# Altium PCB PCB.PcbDoc
Units mm, origin at the board's own origin, x right, y up, seen from the top; angles counter-clockwise.
Board outline 37.47 x 36.7 mm, 2 copper layers (Top Layer, Bottom Layer); 28 components, 24 nets, 64 pads, 0 vias.
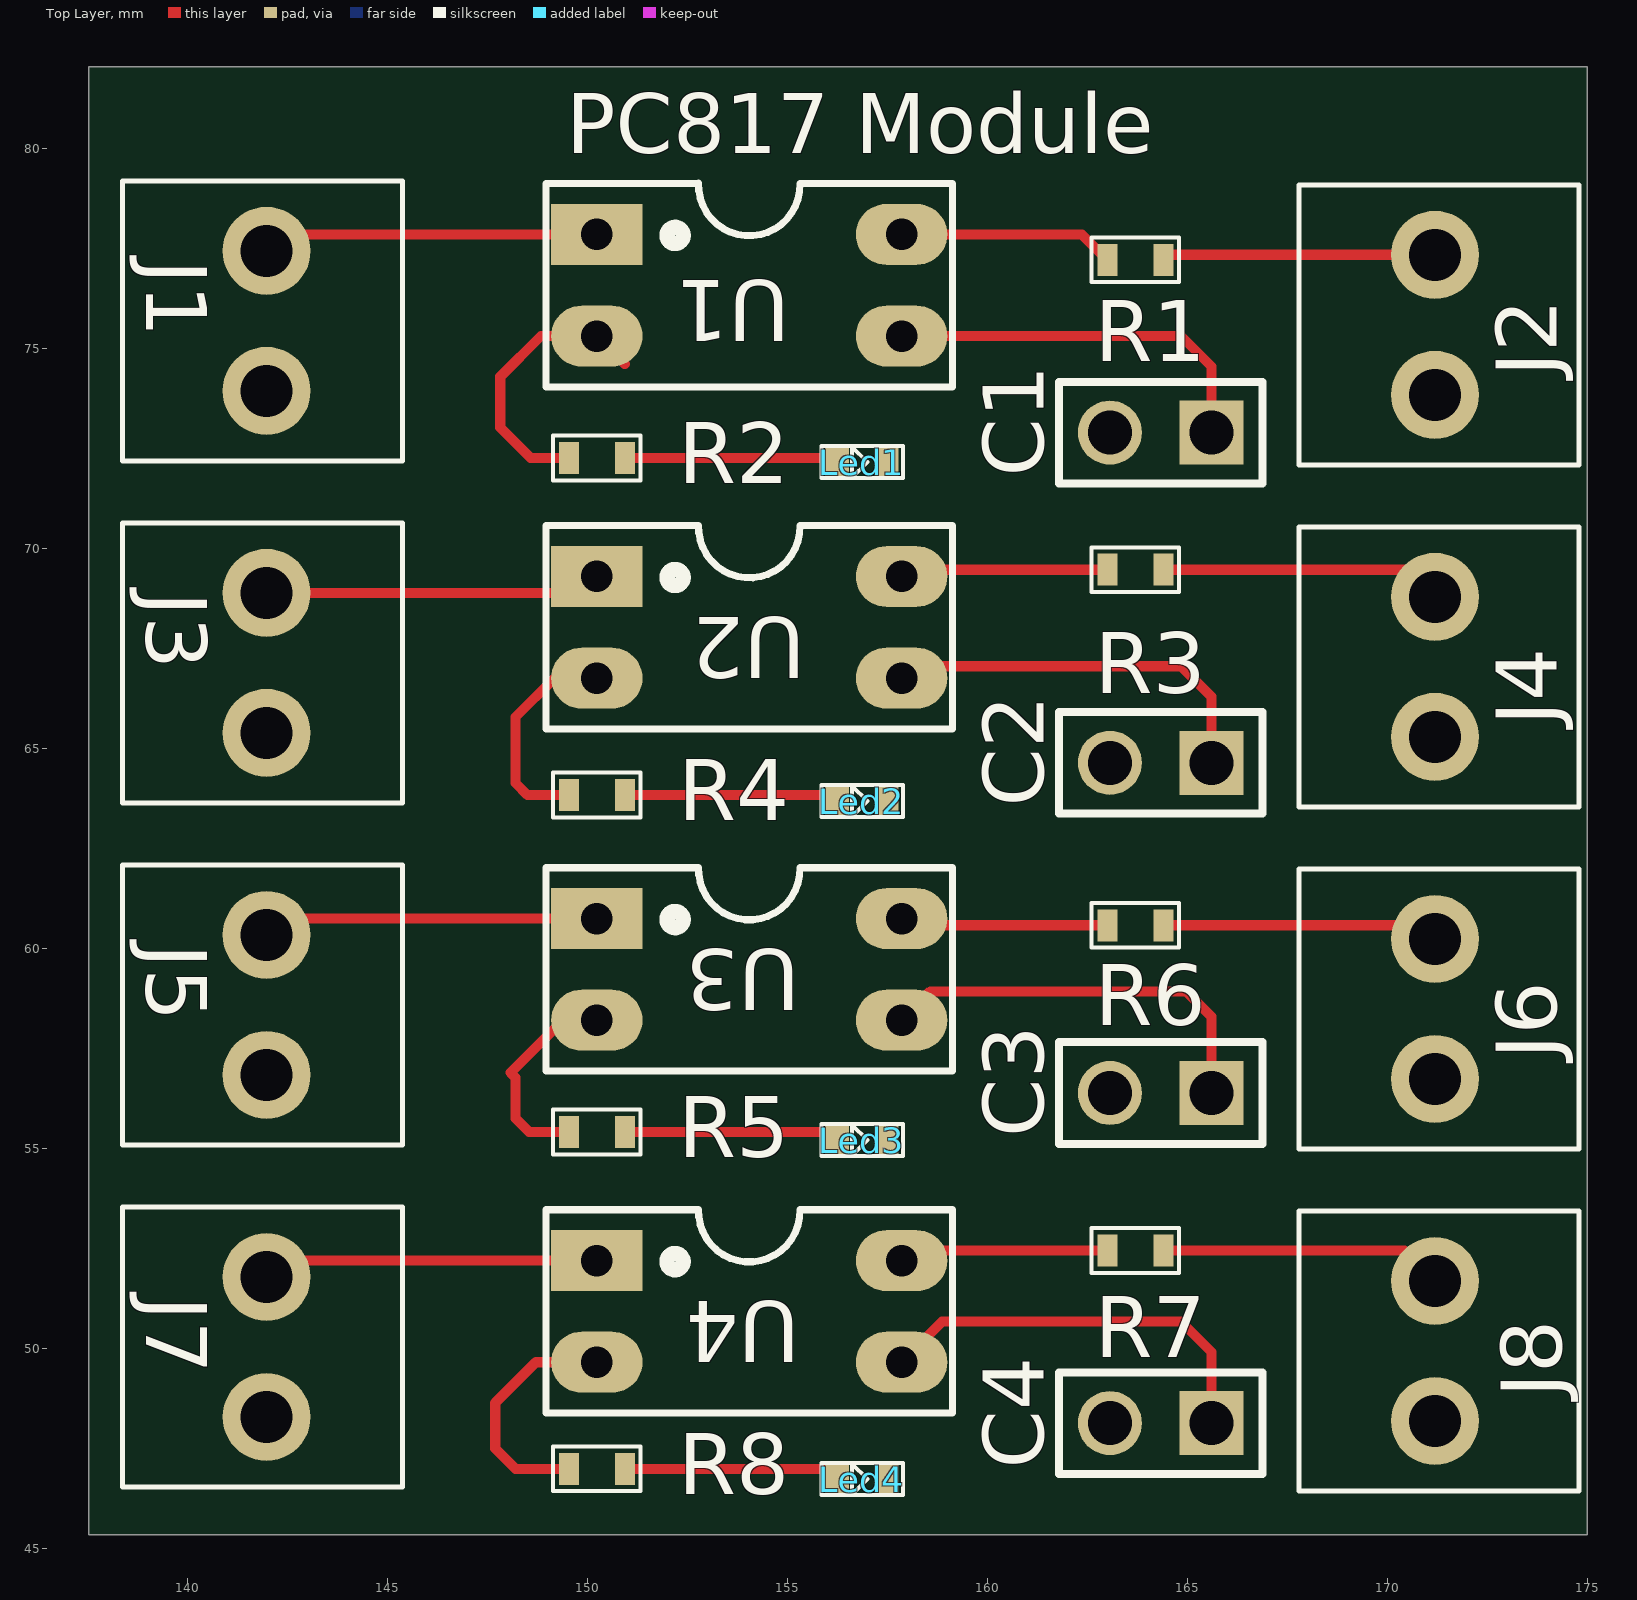
[diagram p0: Top Layer view]
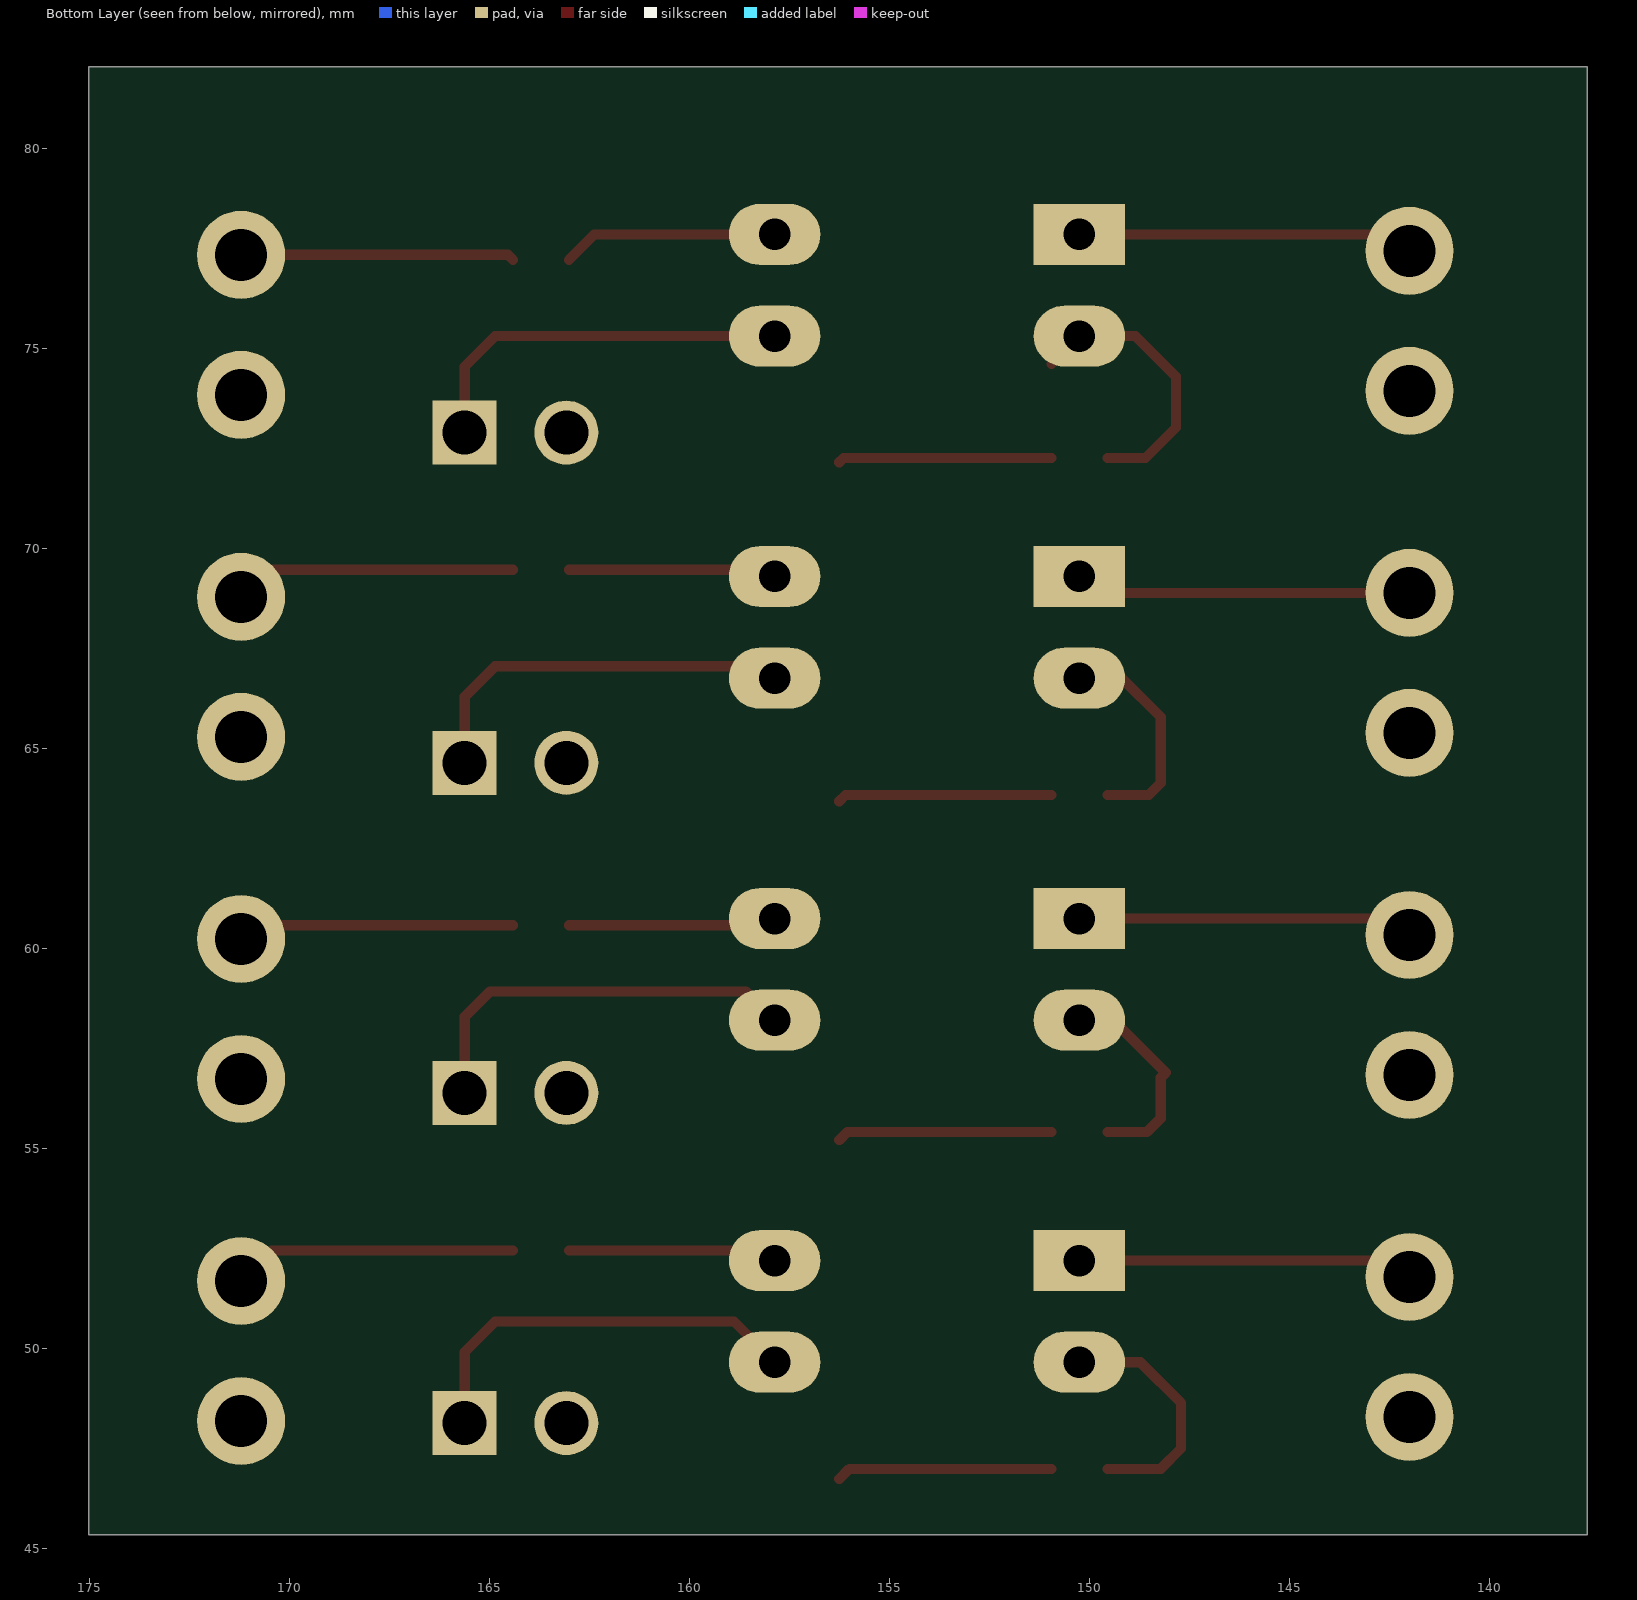
[diagram p1: Bottom Layer view, seen from below]
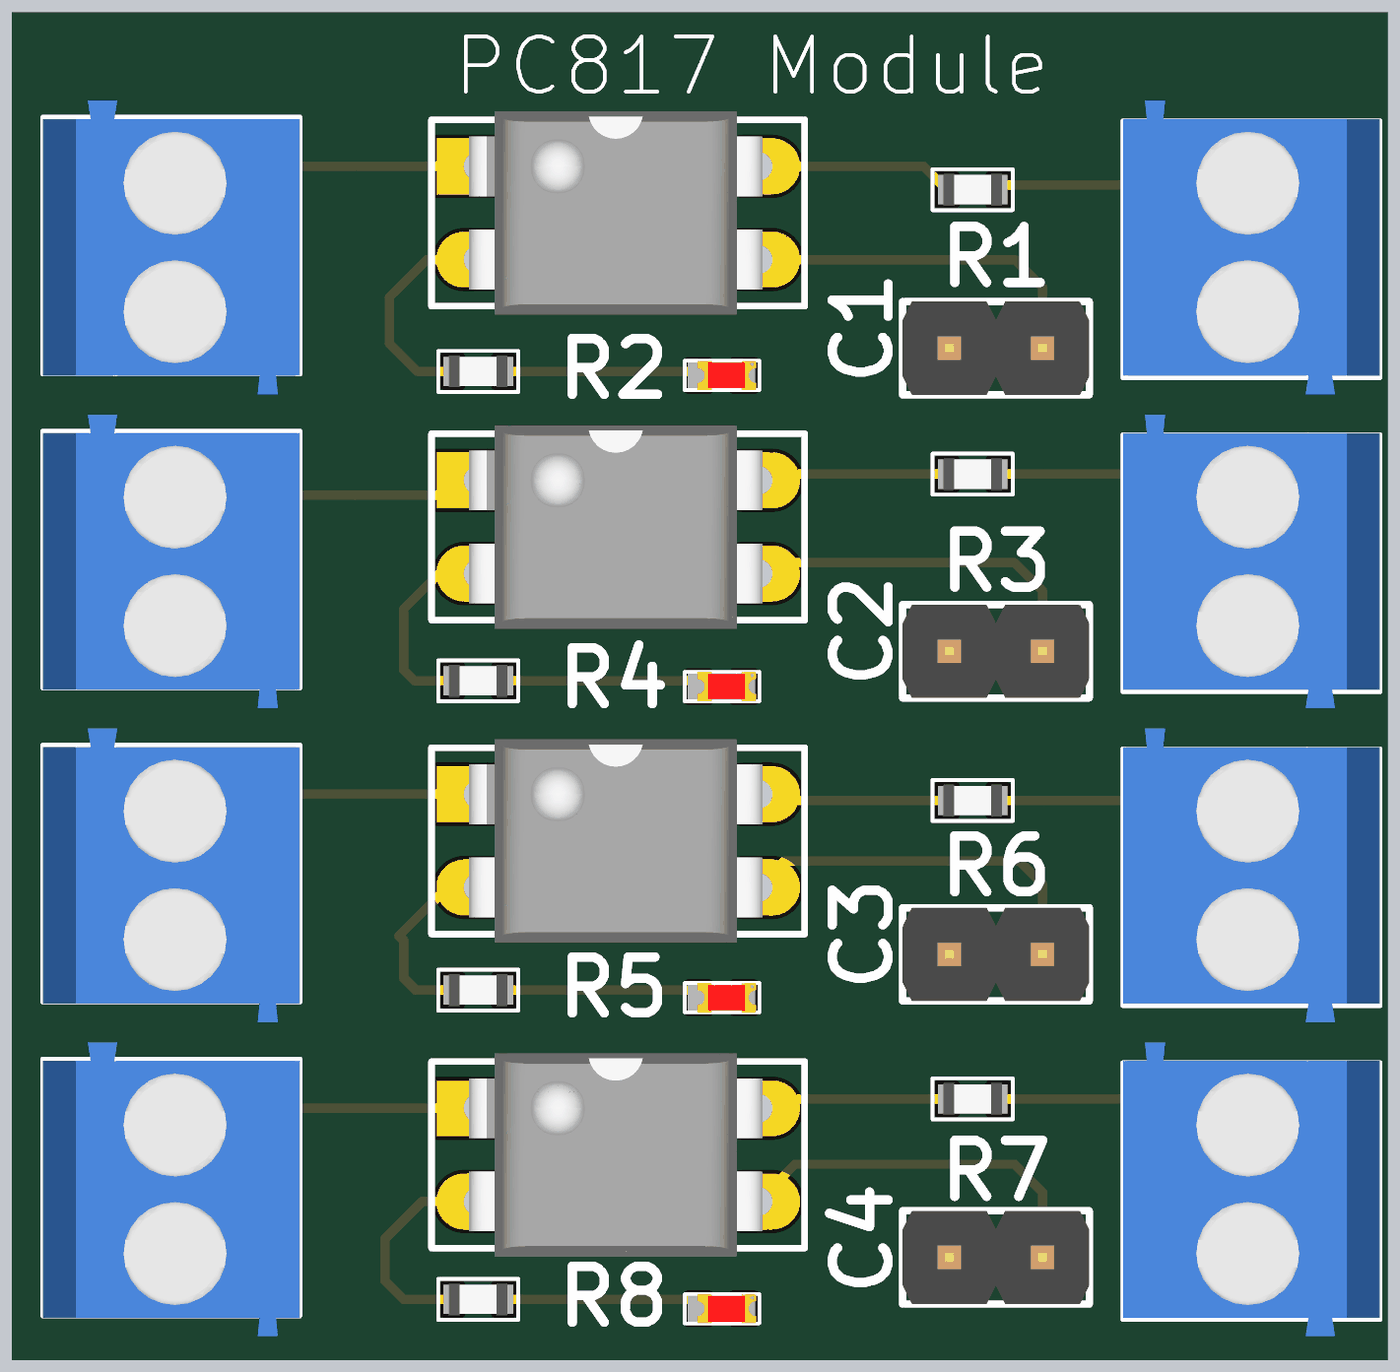
[diagram p2: 3D render of the assembled board from above, using the file's embedded part models]

## Layer stack, top to bottom
Top Solder: solder mask 0.0102, Solder Resist, Dk 3.5
Top Layer: signal copper 0.0356
Dielectric 1: dielectric 0.32, FR-4, Dk 4.8
Bottom Layer: signal copper 0.0356
Bottom Solder: solder mask 0.0102, Solder Resist, Dk 3.5

## Board outline
137.541,45.339 175.006,45.339 175.006,82.042 137.541,82.042

## Design rules (kind name [scope] priority, off if disabled: settings)
Clearance [All] p1: gap=0.254 ignorepadtopadclearanceinfootprint=FALSE except(0: Arc-Hole Track-Hole SMDPad-Hole THPad-Hole Via-Hole Fill-Hole Poly-Hole Region-Hole Text-Hole)
PolygonConnect [All] p1: connectstyle=Relief reliefconductorwidth=0.254 reliefentries=4 polygonreliefangle="90 Angle" airgapwidth=0.254
RoomDefinition Schematic [InComponentClass('Schematic')] p1: confinementstyle=ConfineIn formatcopy=TRUE lockcomponents=FALSE outline 0,0 50.8,0 50.8,25.4 0,25.4
RoutingVias [All] p1: holewidth=0.711 width=1.27 viastyle="Through Hole" minholewidth=0.711 minwidth=1.27 maxholewidth=0.711 maxwidth=1.27
SolderMaskExpansion [All] p1: expansion=0.102
Width [All] p1: maxlimit=0.254 minlimit=0.254 preferedwidth=0.254
30 further rules are at their usual default settings.

## Components (designator, comment, footprint, x,y, rotation, side; value= is the part's Value field where it differs from the comment)
C1 "JP2" JP2-D1T 165.608,72.898 r180 top
C2 "JP2" JP2-D1T 165.608,64.643 r180 top
C3 "JP2" JP2-D1T 165.608,56.388 r180 top
C4 "JP2" JP2-D1T 165.608,48.133 r180 top
J1 "KF2" KF2-3.5 141.986,75.692 r270 top
J2 "KF2" KF2-3.5 171.196,75.592 r90 top
J3 "KF2" KF2-3.5 141.986,67.141 r270 top
J4 "KF2" KF2-3.5 171.196,67.041 r90 top
J5 "KF2" KF2-3.5 141.986,58.589 r270 top
J6 "KF2" KF2-3.5 171.196,58.489 r90 top
J7 "KF2" KF2-3.5 141.986,50.038 r270 top
J8 "KF2" KF2-3.5 171.196,49.938 r90 top
Led1 "Red" "LED 0603 SMD" 156.88,72.156 r0 top
Led2 "Red" "LED 0603 SMD" 156.88,63.683 r0 top
Led3 "Red" "LED 0603 SMD" 156.88,55.209 r0 top
Led4 "Red" "LED 0603 SMD" 156.88,46.736 r0 top
R1 "3k" "SMD 0603 Res" 163.703,77.216 r180 top
R2 "1K" "SMD 0603 Res" 150.241,72.263 r180 top
R3 "3k" "SMD 0603 Res" 163.703,69.469 r180 top
R4 "3k" "SMD 0603 Res" 150.241,63.839 r180 top
R5 "3k" "SMD 0603 Res" 150.241,55.414 r180 top
R6 "3K" "SMD 0603 Res" 163.703,60.579 r180 top
R7 "3K" "SMD 0603 Res" 163.703,52.451 r180 top
R8 "3k" "SMD 0603 Res" 150.241,46.99 r180 top
U1 "PC817" DIP4 150.241,77.851 r270 top
U2 "PC817" DIP4 150.241,69.3 r270 top
U3 "PC817" DIP4 150.241,60.748 r270 top
U4 "PC817" DIP4 150.241,52.197 r270 top

## Footprints (in the part's own frame and the unit in brackets; to place one, negate y for a bottom-side part, rotate by r counter-clockwise, add the part's x,y. Pads: shape width x height; smd on the part's side, far side on the other; paste and mask are expansions set on the pad)
DIP4 [mil]
  rect 60x90 hole 31: 1(0,0)
  oval 60x90 hole 31: 2(100,0) 3(100,300) 4(0,300)
  silkscreen extent -50,-50 150,350, body extent -59,-10 159,305, height 170
JP2-D1T [mm] "2 pins, 1 row, straight, gold plating"
  rect 1.6x1.6 hole 1.1: 1(0,0)
  round 1.6 hole 1.1: 2(2.54,0)
  silkscreen extent -1.27,-1.27 3.81,1.27, body extent -1.27,-1.27 3.81,1.27, height 8.54
KF2-3.5 [mm] "3,50mm - modular - blue - Horizontal wire entry - Pressure clamp - 8,4mm height - 02p"
  round 2.2 hole 1.3: 1(-1.75,0) 2(1.75,0)
  silkscreen extent -3.5,-3.6 3.5,3.4, body extent -3.95,-3.6 4.05,3.4, height 8.41
"LED 0603 SMD" [mm]
  rect 0.6x0.8 smd: 1(-0.635,0) 2(0.6,0)
  silkscreen extent -1.02,-0.4 1.02,0.4, body extent -0.67,-0.4 0.93,0.4, height 0.6
"SMD 0603 Res" [mm]
  rect 0.5x0.8 smd: 1(0.7,0) 2(-0.7,0)
  silkscreen extent -1.09,-0.56 1.09,0.56, body extent -0.8,-0.43 0.8,0.43, height 0.48

## Part data
C1 C2 C3 C4: "WR-PHD 2.54 mm Angled Socket Header", Manufacturer="Würth Elektronik eiSos GmbH", partNo=613002143121, ComponentLink1 Description=Manufacturer, ComponentLink1URL=http://www.we-online.com, ComponentLink2 Description=Datasheet, ComponentLink2URL=http://katalog.we-online.de/em/datasheet/6130xx143121.pdf, Created by="Karrer Zheng", Created Date="29 March 2013", NoPins=02
J1 J2 J3 J4 J5 J6 J7 J8: Manufacturer="Würth Elektronik eiSos GmbH", partNo=691103110002, ComponentLink1 Description=Manufacturer, ComponentLink1URL=http://www.we-online.com, ComponentLink2 Description=Datasheet, ComponentLink2URL=http://katalog.we-online.de/em/datasheet/6911031100xx.pdf, Created by="Karrer Zheng", Created Date="29 October 2013", NoPins=2
Led1 Led2 Led3 Led4: library part "0603 SMD LED"
R1 R2 R3 R4 R5 R6 R7 R8: library part "0603 Res"
U1 U2 U3 U4: "Single Opto"

## Nets (pads, with @x,y where several pads share a name; then routed paths per layer and width w, separated by ;. In a path a pad name is that pad's centre, name@x,y a point inside that pad or via, vN(x,y) a via of type N, cw(c..) or ccw(c..) an arc to the next point about the centre after c; other vN are vias at no path point)
NetC1_1: C1.1 U1.3 | length 9.7
  Top Layer w0.254: U1.3 164.846,75.311 165.608,74.549 C1.1
NetC2_1: C2.1 U2.3 | length 9.8
  Top Layer w0.254: U2.3 158.157,67.056 164.846,67.056 165.608,66.294 C2.1
NetC3_1: C3.1 U3.3 | length 10.2
  Top Layer w0.254: U3.3 158.581,58.928 164.973,58.928 165.608,58.293 C3.1
NetC4_1: C4.1 U4.3 | length 10.3
  Top Layer w0.254: U4.3 158.877,50.673 164.846,50.673 165.608,49.911 C4.1
NetJ1_1: J1.1 U1.1 | length 8.4
  Top Layer w0.254: J1.1 142.395,77.851 U1.1
NetJ2_2: J2.2 R1.2 | length 6.8
  Top Layer w0.254: R1.2 164.529,77.342 J2.2
NetJ3_1: J3.1 U2.1 | length 8.4
  Top Layer w0.254: J3.1 149.832,68.891 U2.1
NetJ4_2: J4.2 R3.2 | length 7.1
  Top Layer w0.254: R3.2 170.518,69.469 J4.2
NetJ5_1: J5.1 U3.1 | length 8.4
  Top Layer w0.254: J5.1 142.395,60.748 U3.1
NetJ6_2: J6.2 R6.2 | length 6.9
  Top Layer w0.254: R6.2 170.856,60.579 J6.2
NetJ7_1: J7.1 U4.1 | length 8.4
  Top Layer w0.254: J7.1 142.395,52.197 U4.1
NetJ8_2: J8.2 R7.2 | length 7.1
  Top Layer w0.254: R7.2 170.433,52.451 J8.2
NetLed1_1: Led1.1 R2.2 | length 5.3
  Top Layer w0.254: R2.2 156.138,72.263 Led1.1
NetLed2_1: Led2.1 R4.2 | length 5.4
  Top Layer w0.254: R4.2 156.089,63.839 Led2.1
NetLed3_1: Led3.1 R5.2 | length 5.4
  Top Layer w0.254: R5.2 156.04,55.414 Led3.1
NetLed4_1: Led4.1 R8.2 | length 5.4
  Top Layer w0.254: R8.2 155.991,46.99 Led4.1
NetR1_1: R1.1 U1.4 | length 5.4
  Top Layer w0.254: U1.4 162.368,77.851 R1.1
NetR2_1: R2.1 U1.2 | length 7.1
  Top Layer w0.254: R2.1 148.59,72.263 147.828,73.025 147.828,74.295 148.844,75.311 U1.2 150.941,74.611
NetR3_1: R3.1 U2.4 | length 5.2
  Top Layer w0.254: U2.4 158.03,69.469 R3.1
NetR4_1: R4.1 U2.2 | length 5.5
  Top Layer w0.254: R4.1 148.505,63.839 148.209,64.135 148.209,65.786 149.183,66.76 U2.2
NetR5_1: R5.1 U3.2 | length 5.4
  Top Layer w0.254: R5.1 148.548,55.414 148.209,55.753 148.209,56.769 148.082,56.896 149.394,58.208 U3.2
NetR6_1: R6.1 U3.4 | length 5.2
  Top Layer w0.254: U3.4 158.03,60.579 R6.1
NetR7_1: R7.1 U4.4 | length 5.2
  Top Layer w0.254: U4.4 158.115,52.451 R7.1
NetR8_1: R8.1 U4.2 | length 6.2
  Top Layer w0.254: R8.1 148.209,46.99 147.701,47.498 147.701,48.641 148.717,49.657 U4.2
pads on no net: C1.2 C2.2 C3.2 C4.2 J1.2 J2.1 J3.2 J4.1 J5.2 J6.1 J7.2 J8.1 Led1.2 Led2.2 Led3.2 Led4.2

## Silkscreen, mask and mechanical layers (free items; w line width, h text height)
Top Overlay:
  text "PC817 Module" at 149.479,79.883 h1.5